# Altium PCB BalanceCar.PcbDoc
Units mm, origin at the board's own origin, x right, y up, seen from the top; angles counter-clockwise.
Board outline 80 x 80 mm, 2 copper layers (Top Layer, Bottom Layer); 50 components, 45 nets, 217 pads, 266 vias.
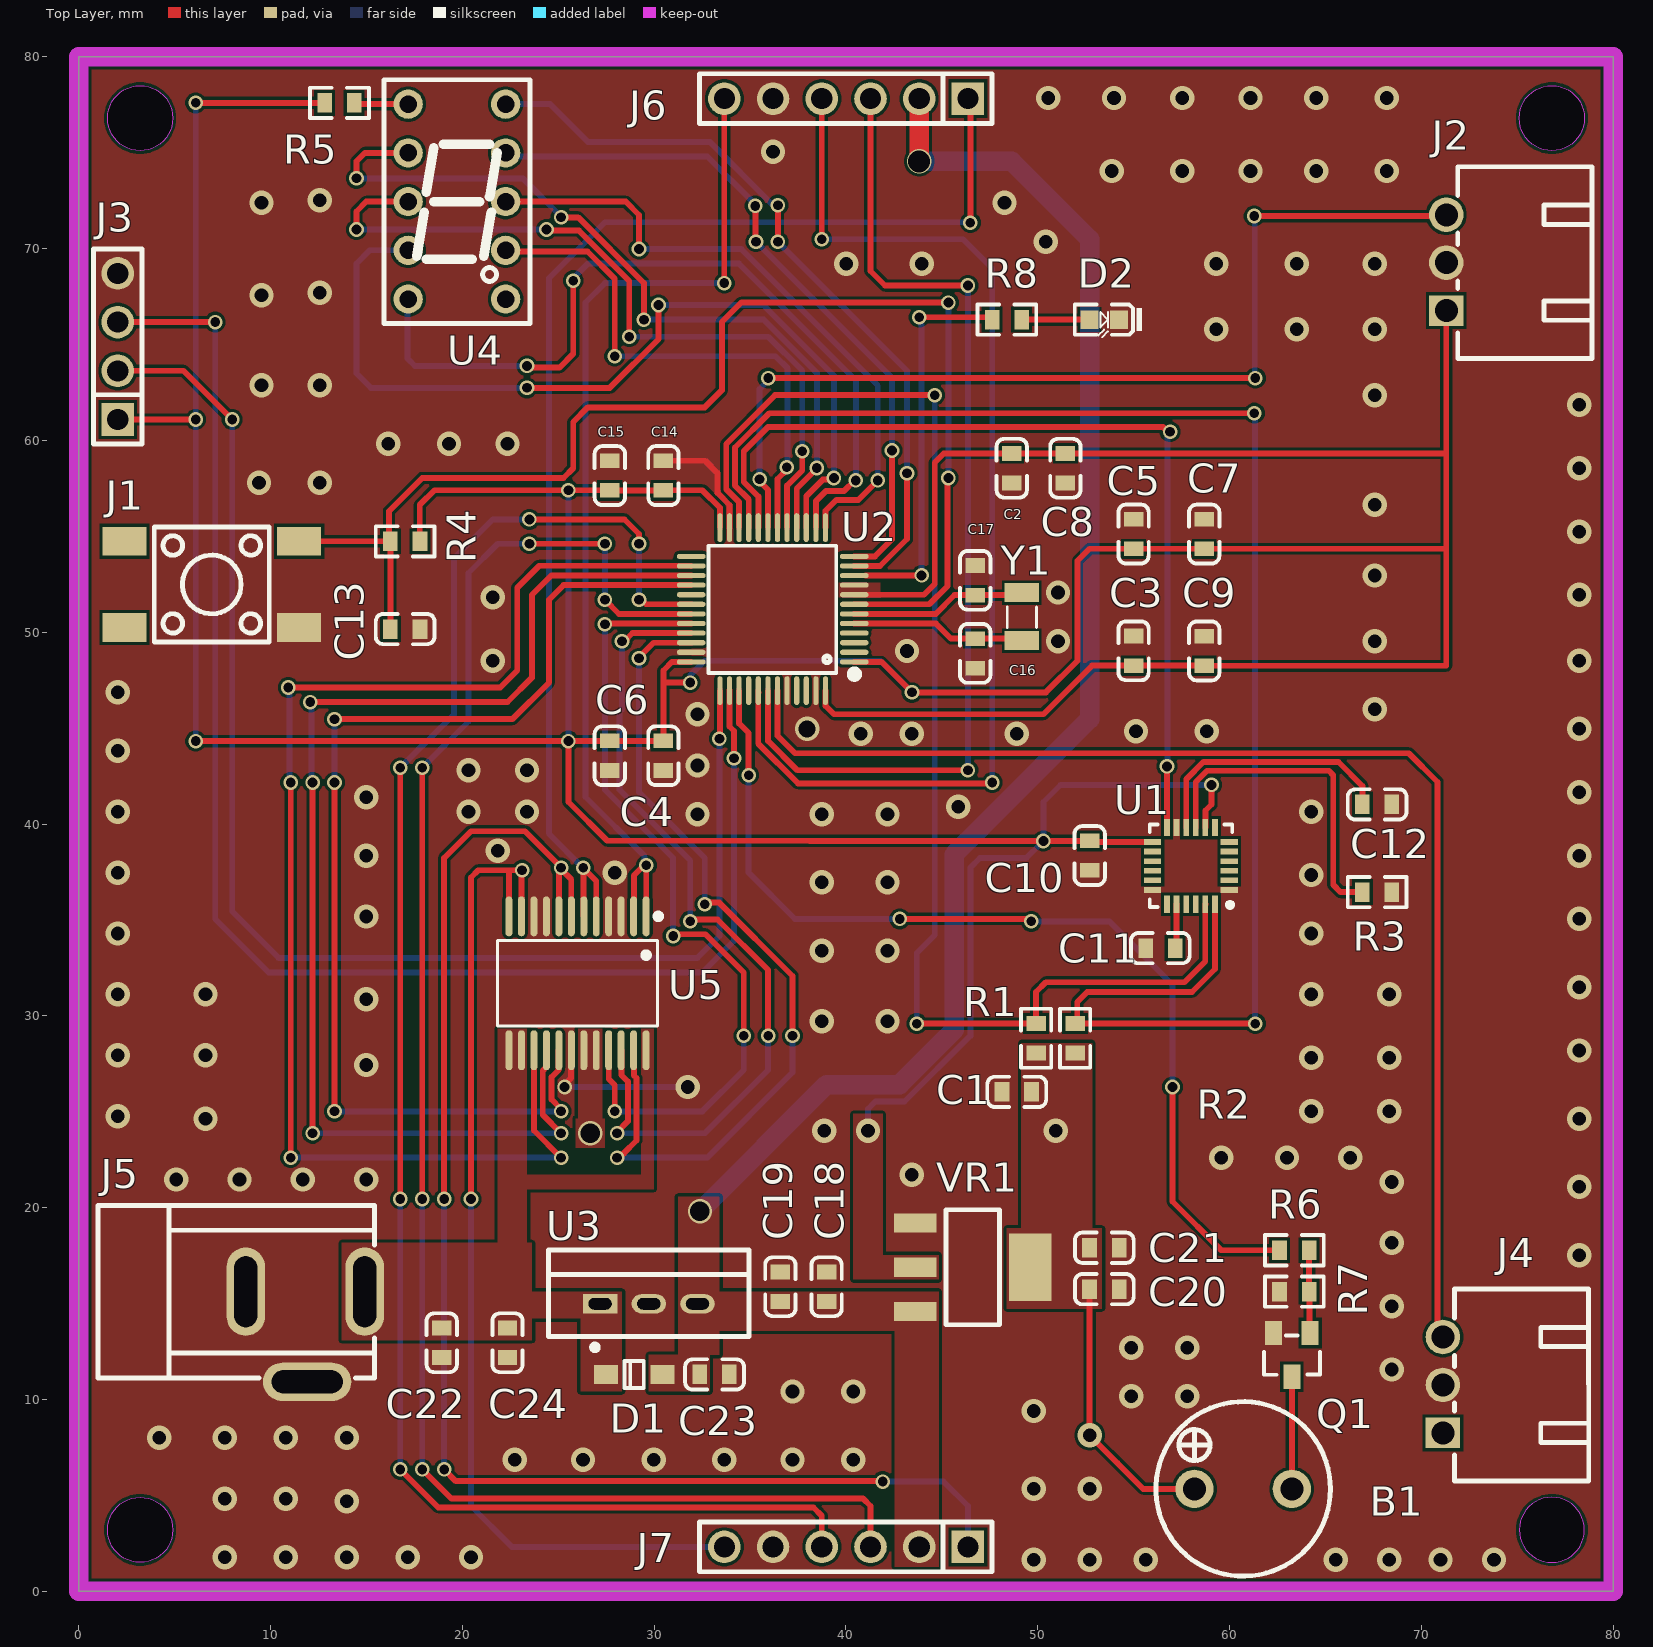
[diagram p0: Top Layer view]
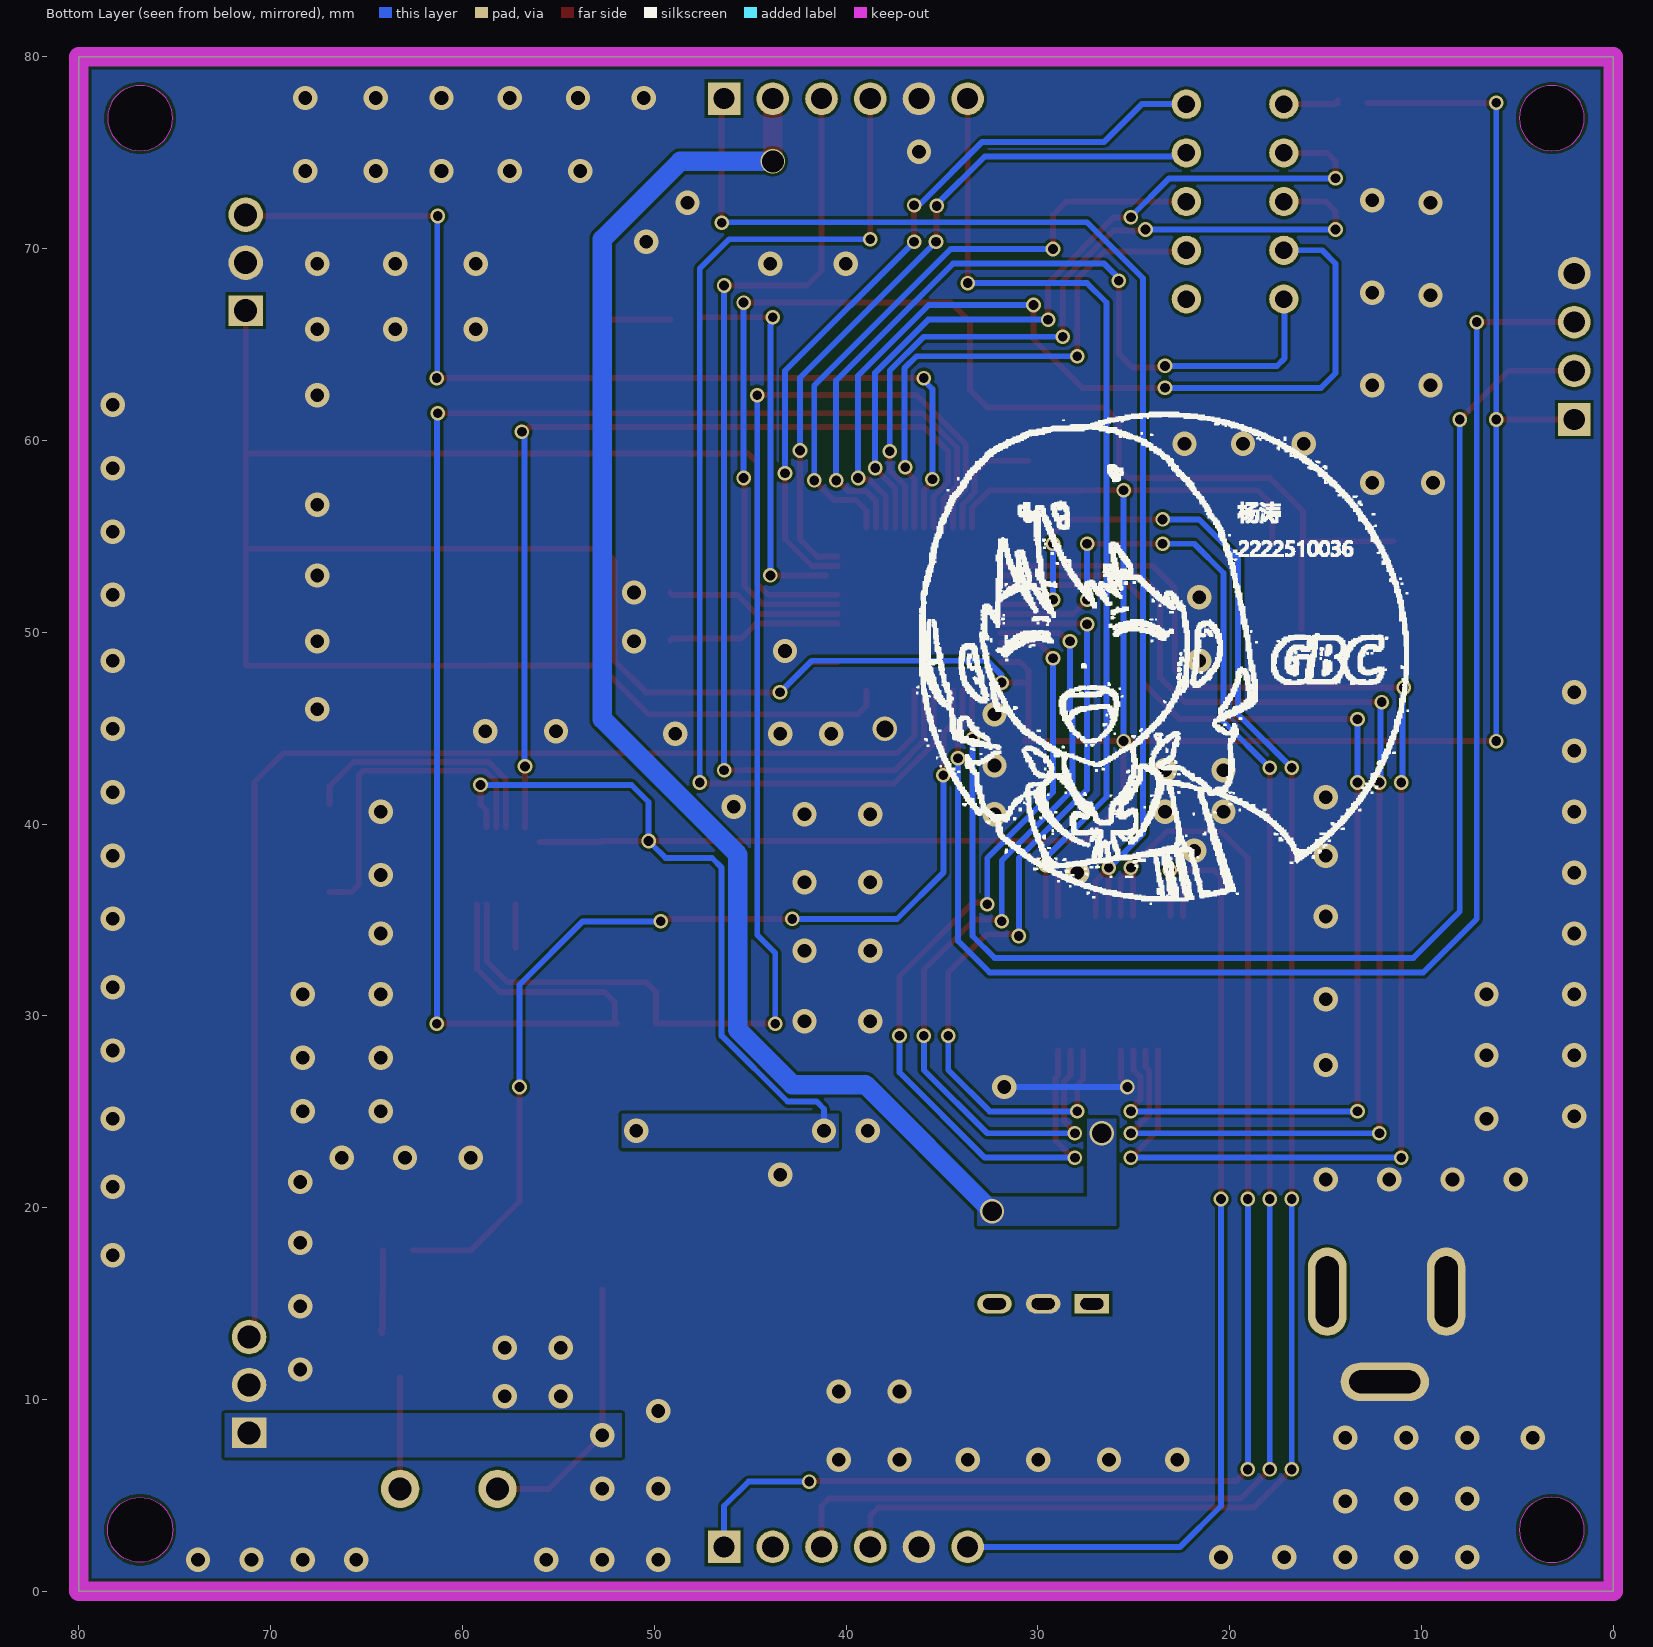
[diagram p1: Bottom Layer view, seen from below]
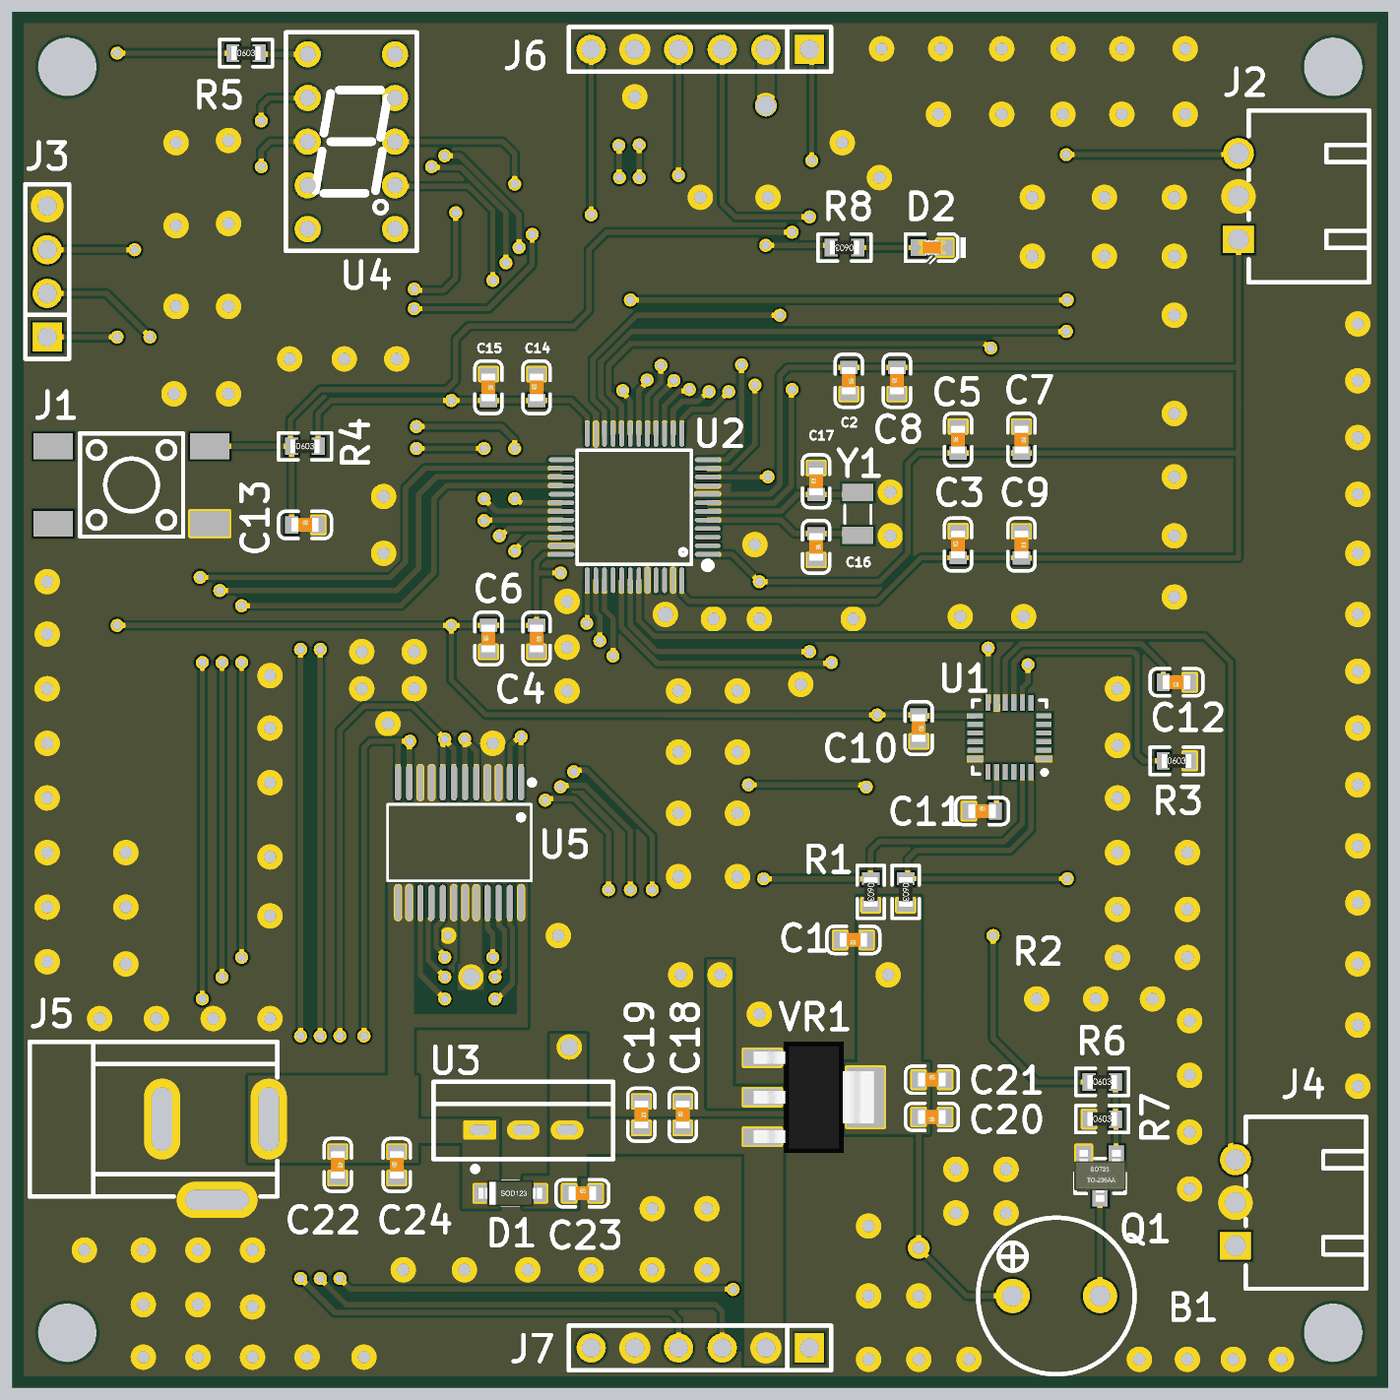
[diagram p2: 3D render of the assembled board from above, using the file's embedded part models]

## Layer stack, top to bottom
Top Solder: solder mask 0.0102, Solder Resist, Dk 3.5
Top Layer: signal copper 0.0356
Dielectric 1: dielectric 0.32, FR-4, Dk 4.8
Bottom Layer: signal copper 0.0356
Bottom Solder: solder mask 0.0102, Solder Resist, Dk 3.5

## Board outline
0,0 0,80 80,80 80,0
cut-out: 75.1,3.2 ccw(c76.8,3.2) 76.8,1.5 ccw(c76.8,3.2) 78.5,3.2 ccw(c76.8,3.2) 76.8,4.9 ccw(c76.8,3.2)
cut-out: 76.8,75.1 cw(c76.8,76.8) 75.1,76.8 cw(c76.8,76.8) 76.8,78.5 cw(c76.8,76.8) 78.5,76.8 cw(c76.8,76.8)
cut-out: 3.2,75.1 cw(c3.2,76.8) 1.5,76.8 cw(c3.2,76.8) 3.2,78.5 cw(c3.2,76.8) 4.9,76.8 cw(c3.2,76.8)
cut-out: 3.2,1.5 cw(c3.2,3.2) 1.5,3.2 cw(c3.2,3.2) 3.2,4.9 cw(c3.2,3.2) 4.9,3.2 cw(c3.2,3.2)

## Design rules (kind name [scope] priority, off if disabled: settings)
Clearance [All] p1: gap=0.152 ignorepadtopadclearanceinfootprint=TRUE
PolygonConnect [All] p1: connectstyle=Direct reliefconductorwidth=0.254 reliefentries=4 polygonreliefangle="90 Angle" airgapwidth=0.254
RoutingVias [All] p1: holewidth=0.508 width=0.762 viastyle="Through Hole" minholewidth=0.508 minwidth=0.762 maxholewidth=1.27 maxwidth=1.27
SolderMaskExpansion [All] p1: expansion=0.102 istentingtop=FALSE
Width [All] p1: maxlimit=1.27 minlimit=0.305 preferedwidth=0.305
30 further rules are at their usual default settings.

## Classes and differential pairs
component class 2_BalanceControl: B1 C1 C2 C3 C4 C5 C6 C7 C8 C9 C10 C11 C12 C13 C14 C15 C16 C17 D2 J1 J2 J3 J4 Q1 R1 R2 R3 R4 R5 R6 R7 R8 U1 U2 U4 Y1
component class 1_Power: *3 C18 C19 C20 C21 C22 C23 C24 D1 J5 J6 J7 U3 U5 VR1

## Components (designator, comment, footprint, x,y, rotation, side; value= is the part's Value field where it differs from the comment)
B1 "BEEP" BEEP-9MM 60.534,5.216 r0 top
C1 "0.1uF/25V" C0603 48.903,26.035 r180 top
C2 "100uF/25V" C0603 48.641,58.547 r270 top
C3 "100uF/25V" C0603 54.991,49.03 r90 top
C4 "100uF/25V" C0603 30.48,43.561 r270 top
C5 "100uF/25V" C0603 54.991,55.118 r90 top
C6 "100nF /25V" C0603 27.686,43.561 r90 top
C7 "100nF /25V" C0603 58.674,55.118 r270 top
C8 "100nF /25V" C0603 51.435,58.547 r90 top
C9 "100nF /25V" C0603 58.674,49.022 r270 top
C10 "10nF /25V" C0603 52.705,38.354 r270 top
C11 "2.2nF /25V" C0603 56.388,33.528 r0 top
C12 "0.1uF/25V" C0603 67.691,41.021 r180 top
C13 "1uF /25V" C0603 17.018,50.165 r0 top
C14 "100uF/25V" C0603 30.48,58.166 r90 top
C15 "100nF /25V" C0603 27.686,58.166 r270 top
C16 "12pF/25V" C0603 46.736,48.895 r270 top
C17 "12pF/25V" C0603 46.736,52.705 r90 top
C18 "100uF/25V" C0603 38.989,15.875 r90 top
C19 "100nF/25V" C0603 36.576,15.875 r270 top
C20 "100nF/25V" C0603 53.467,15.748 r180 top
C21 "100uF/25V" C0603 53.467,17.907 r0 top
C22 "100uF/25V" C0603 18.923,12.954 r270 top
C23 "100uF/25V" C0603 33.147,11.303 r0 top
C24 "100nF/25V" C0603 22.352,12.954 r90 top
D1 "B5819W  SL" SOD-123 28.956,11.303 r0 top
D2 "红灯 0603" LED-0603_S1 53.459,66.294 r180 top
J1 "SW" SW-SMD_4P-L6.0-W6.0 6.858,52.451 r0 top
J2 "CON3-2.54" DIP-3P-2.54-W 71.628,69.469 r90 top
J3 "SIP4-CON4" DIP-4P-2.54-N 2.039,64.941 r90 top
J4 "CON3-2.54" DIP-3P-2.54-W 71.453,10.961 r90 top
J5 "DC005-2.5MM" DC-IN-TH_DC005 10.287,15.367 r0 top
J6 "CON6-2.54" HDR-TH_6P-P2.54-V-M 40,79 r180 top
J7 "CON6-2.54" HDR-TH_6P-P2.54-V-M 40,3.5 r180 top
Q1 "S8050" SOT-23-3 63.246,12.319 r90 top
R1 "10KΩ /±5%" R0603 49.911,28.829 r270 top
R2 "10KΩ /±5%" R0603 51.943,28.829 r270 top
R3 "4.7KΩ /±5%" R0603 67.691,36.449 r0 top
R4 "10KΩ ±1%" R0603 17.018,54.737 r0 top
R5 "1KΩ ±1%" R0603 13.589,77.597 r0 top
R6 "1KΩ ±1%" R0603 63.373,17.78 r0 top
R7 "10KΩ ±1%" R0603 63.373,15.621 r0 top
R8 "1KΩ ±1%" R0603 48.387,66.294 r180 top
U1 "MPU6050" QFN-24_L4.0-W4.0-P0.50-BL 58.039,37.719 r90 top
U2 "STM32F103C8T6" LQFP-48_L7.0-W7.0 36.068,50.927 r90 top
U3 "LM7805CTG" TO-220-3_L10.2-W4.5-P2.54-L 29.781,14.873 r0 top
U4 "HDSP-7801" LED-SEG-SMD_HDSP-7801 19.812,72.517 r0 top
U5 "TB6612FNG" SSOP-24_L8.4-W5.8-P0.65-LS7.8-BL 26.035,31.877 r180 top
VR1 "AMS1117-3.3" SOT-223 46.609,16.891 r180 top
Y1 "16MHz" CRYSTAL-SMD_L3.2-W1.5 49.149,50.8 r270 top

## Footprints (in the part's own frame and the unit in brackets; to place one, negate y for a bottom-side part, rotate by r counter-clockwise, add the part's x,y. Pads: shape width x height; smd on the part's side, far side on the other; paste and mask are expansions set on the pad)
BEEP-9MM [mm]
  round 2 hole 1.2: 1(-2.368,0.118) 2(2.712,0.118)
  silkscreen extent -4.37,-4.43 4.72,4.67
C0603 [mil]
  rect 30x40 smd: 1(-30.31,0) 2(30.31,0)
  silkscreen extent -60,-31 60,31, body extent -31,-16 32,16, height 12
CRYSTAL-SMD_L3.2-W1.5 [mm]
  rect 1x1.8 smd paste+0 mask+0.05: 1(-1.261,0.017) 2(1.239,0.017)
  silkscreen extent -0.52,-0.75 0.56,0.78
DC-IN-TH_DC005 [mm]
  oval 2x4.6 hole 1.2 slot 3.7 at 90 deg paste-2539.97 mask+0.051: 1(4.622,0.252) 2(-1.577,0.253)
  oval 4.6x2 hole 1.2 slot 3.7 at 0 deg paste-2539.97 mask+0.051: 3(1.623,-4.448)
  silkscreen extent -9.28,-4.25 5.12,4.75
DIP-3P-2.54-W [mm]
  rect 1.6x1.8 hole 1.2: 1(-2.706,0.333)
  round 1.8 hole 1.2: 2(-0.206,0.333) 3(2.294,0.333)
  silkscreen extent -5.21,-7.27 4.79,-0.27
DIP-4P-2.54-N [mm]
  rect 1.7x1.7 hole 1.1: 1(-3.854,0.007)
  round 1.7 hole 1.1: 2(-1.314,0.007) 3(1.226,0.007) 4(3.766,0.007)
  silkscreen extent -5.12,-1.26 5.04,1.28
HDR-TH_6P-P2.54-V-M [mm]
  rect 1.7x1.7 hole 1.1 paste-2539.97 mask+0.051: 1(-6.357,1.186)
  round 1.7 hole 1.1 paste-2539.97 mask+0.051: 2(-3.817,1.186) 3(-1.277,1.186) 4(1.263,1.186) 5(3.803,1.186) 6(6.343,1.186)
  silkscreen extent -7.61,-0.11 7.64,2.49
LED-0603_S1 [mm]
  rect 0.93x0.98 smd: A(0.77,0) K(-0.77,0)
  silkscreen extent -1.98,-0.79 1.54,0.92, body extent -0.8,-0.4 0.8,0.4, height 0.6
LED-SEG-SMD_HDSP-7801 [mil]
  round 60 hole 36 paste-99999 mask+2: 1(-103.78,197.32) 2(-103.78,97.32) 3(-103.78,-2.68) 4(-103.78,-102.68) 5(-103.78,-202.68) 6(96.22,-202.68) 7(96.22,-102.68) 8(96.22,-2.68) 9(96.22,97.32) 10(96.22,197.32)
  silkscreen extent -154,-253 146,247
LQFP-48_L7.0-W7.0 [mm]
  oval 0.27x1.5 smd paste+0 mask+0.05: 1(-2.474,-4.361) 2(-1.974,-4.361) 3(-1.474,-4.361) 4(-0.974,-4.361) 5(-0.474,-4.361) 6(0.026,-4.361) 7(0.526,-4.361) 8(1.026,-4.361) 9(1.526,-4.361) 10(2.026,-4.361) 11(2.526,-4.361) 12(3.026,-4.361) 25(3.026,4.139) 26(2.526,4.139) 27(2.026,4.139) 28(1.526,4.139) 29(1.026,4.139) 30(0.526,4.139) 31(0.026,4.139) 32(-0.474,4.139) 33(-0.974,4.139) 34(-1.474,4.139) 35(-1.974,4.139) 36(-2.474,4.139)
  oval 1.5x0.27 smd paste+0 mask+0.05: 13(4.526,-2.861) 14(4.526,-2.361) 15(4.526,-1.861) 16(4.526,-1.361) 17(4.526,-0.861) 18(4.526,-0.361) 19(4.526,0.139) 20(4.526,0.639) 21(4.526,1.139) 22(4.526,1.639) 23(4.526,2.139) 24(4.526,2.639) 37(-3.974,2.639) 38(-3.974,2.139) 39(-3.974,1.639) 40(-3.974,1.139) 41(-3.974,0.639) 42(-3.974,0.139) 43(-3.974,-0.361) 44(-3.974,-0.861) 45(-3.974,-1.361) 46(-3.974,-1.861) 47(-3.974,-2.361) 48(-3.974,-2.861)
  silkscreen extent -3.31,-4.57 3.58,3.23
QFN-24_L4.0-W4.0-P0.50-BL [mm]
  rect 0.3x0.9 smd paste+0 mask+0.05: 1(-1.156,-1.946) 2(-0.656,-1.946) 3(-0.156,-1.946) 4(0.344,-1.946) 5(0.844,-1.946) 6(1.344,-1.946) 13(1.344,2.054) 14(0.844,2.054) 15(0.344,2.054) 16(-0.156,2.054) 17(-0.656,2.054) 18(-1.156,2.054)
  rect 0.9x0.3 smd paste+0 mask+0.05: 7(2.094,-1.196) 8(2.094,-0.696) 9(2.094,-0.196) 10(2.094,0.304) 11(2.094,0.804) 12(2.094,1.304) 19(-1.906,1.304) 20(-1.906,0.804) 21(-1.906,0.304) 22(-1.906,-0.196) 23(-1.906,-0.696) 24(-1.906,-1.196)
  silkscreen extent -2.19,-2.23 2.26,2.2
R0603 [mil]
  rect 30x40 smd: 1(-30.31,0) 2(30.32,0)
  silkscreen extent -60,-31 60,31, body extent -33,-16 33,16, height 22
SOD-123 [mm]
  rect 1.25x1 smd: 1(1.475,0) 2(-1.475,0)
  silkscreen extent -0.5,-0.7 0.5,0.7, body extent -1.85,-0.77 1.85,0.78, height 1.35
SOT-23-3 [mil]
  rect 50x35 smd: 1(45,-37.4) 2(45,37.4) 3(-45,0)
  silkscreen extent -41,-57 40,57, body extent -59,-59 59,59, height 51
SOT-223 [mm]
  rect 2.2x1 smd: 1(3,-2.3) 2(3,0) 3(3,2.3)
  rect 2.2x3.5 smd: 4(-3,0)
  silkscreen extent -1.4,-3 1.4,3, body extent -3.49,-3.4 3.49,3.4, height 1.64
SSOP-24_L8.4-W5.8-P0.65-LS7.8-BL [mm]
  oval 0.364x2.082 smd paste+0 mask+0.051: 1(-3.544,-3.31) 2(-2.894,-3.31) 3(-2.244,-3.31) 4(-1.594,-3.31) 5(-0.944,-3.31) 6(-0.294,-3.31) 7(0.356,-3.31) 8(1.006,-3.31) 9(1.656,-3.31) 10(2.306,-3.31) 11(2.956,-3.31) 12(3.606,-3.31) 13(3.606,3.672) 14(2.956,3.672) 15(2.306,3.672) 16(1.656,3.672) 17(1.006,3.672) 18(0.356,3.672) 19(-0.294,3.672) 20(-0.944,3.672) 21(-1.594,3.672) 22(-2.244,3.672) 23(-2.894,3.672) 24(-3.544,3.672)
  silkscreen extent -4.33,-3.46 4.21,2.4
SW-SMD_4P-L6.0-W6.0 [mm]
  rect 2.3x1.5 smd: 1(-4.474,2.288) 2(4.626,2.288) 3(-4.474,-2.212) 4(4.626,-2.212)
  silkscreen extent -2.92,-2.96 3.08,3.04
TO-220-3_L10.2-W4.5-P2.54-L [mm]
  rect 1.8x1 hole 0.6 slot 1.2 at 0 deg paste-2539.97 mask+0.051: 1(-2.603,0.113)
  oval 1.8x1 hole 0.6 slot 1.2 at 0 deg paste-2539.97 mask+0.051: 2(-0.063,0.113) 3(2.477,0.113)
  silkscreen extent -5.29,-2.31 5.16,2.91

## Part data
C1 C10 C11 C12 C15: library part "1206 100nF (104) 10% 50V", "贴片电容", Package=1206, SuppliersPartNumber=C24497, ComponentLink1Description=供应商链接, ComponentLink1URL=http://www.szlcsc.com/product/details_25237.html, Supplier=LC
C6 C7 C8 C9 C13: library part "0402 20pF (200) 5% 50V", "贴片电容", Package=0402, SuppliersPartNumber=C1554, ComponentLink1Description=供应商链接, ComponentLink1URL=http://www.szlcsc.com/product/details_1906.html, Supplier=LC
C16 C17 C19 C20 C24: library part "0805 100nF(104) 10% 50V", "贴片电容", Package=0805, SuppliersPartNumber=C49678, ComponentLink1Description=供应商链接, ComponentLink1URL=http://www.szlcsc.com/product/details_50686.html, Supplier=LC
D1: library part "SOD-123 B5819W  SL", "肖特基二极管", Package=SOD-123, SuppliersPartNumber=C8598, ComponentLink1Description=供应商链接, ComponentLink1URL=http://www.szlcsc.com/product/details_9093.html, Supplier=LC
D2: library part "0603 红灯", "发光二极管", Package=0603, SuppliersPartNumber=C2286, ComponentLink1Description=供应商链接, ComponentLink1URL=http://www.szlcsc.com/product/details_2659.html, Supplier=LC
R1 R2 R3 R4: library part "0402 0Ω (0R0) 1%", "贴片电阻", Package=0402, SuppliersPartNumber=C17168, ComponentLink1Description=供应商链接, ComponentLink1URL=http://www.szlcsc.com/product/details_17853.html, Supplier=LC
R5 R6 R7 R8: library part "0603 1KΩ (1001) 1%", "贴片电阻", Package=0603, SuppliersPartNumber=C21190, ComponentLink1Description=供应商链接, ComponentLink1URL=http://www.szlcsc.com/product/details_21904.html, Supplier=LC
VR1: library part "SOT-223 AMS1117-3.3", "低压差线性稳压(LDO)", Package=SOT-223, SuppliersPartNumber=C6186, ComponentLink1Description=供应商链接, ComponentLink1URL=http://www.szlcsc.com/product/details_6652.html, Supplier=LC
Y1: library part "FC-135R 32.7680KF"

## Via types
v1: diameter 1.27, hole 0.711, Top Layer to Bottom Layer, 156 vias
v2: diameter 0.762, hole 0.508, Top Layer to Bottom Layer, 106 vias
v3: diameter 1.27, hole 1.016, Top Layer to Bottom Layer, 2 vias
v4: diameter 1.27, hole 1.143, Top Layer to Bottom Layer, 1 vias
v5: diameter 1.27, hole 0.889, Top Layer to Bottom Layer, 1 vias

## Nets (pads, with @x,y where several pads share a name; then routed paths per layer and width w, separated by ;. In a path a pad name is that pad's centre, name@x,y a point inside that pad or via, vN(x,y) a via of type N, cw(c..) or ccw(c..) an arc to the next point about the centre after c; other vN are vias at no path point)
AIN1: U2.32 U5.21 | length 43.1
  Top Layer w0.305: v2(27.432,50.419) 27.466,50.453 U2.32 ; U5.21 27.629,26.707 27.94,26.396 v2(27.94,25.019) ; v2(30.988,34.163) 31.075,34.25 32.679,34.25 34.671,32.258 34.671,29.167 34.587,29.083 34.544,29.083 v2(34.671,28.956)
  Bottom Layer w0.305: v2(27.432,50.419) 27.432,41.783 30.988,38.227 v2(30.988,34.163) ; v2(27.94,25.019) 27.94,24.892 28.067,25.019 32.512,25.019 34.671,27.178 v2(34.671,28.956)
AIN2: U2.33 U5.22 | length 44.5
  Top Layer w0.305: v2(28.067,23.876) 28.067,23.944 28.626,24.503 28.626,26.573 28.291,26.908 28.291,28.194 U5.22 ; v2(28.321,49.53) 28.445,49.53 28.868,49.953 U2.33 ; v2(31.877,34.936) 31.964,35.024 33.302,35.024 35.941,32.385 v2(35.941,28.956)
  Bottom Layer w0.305: v2(28.067,23.876) 32.639,23.876 35.941,27.178 v2(35.941,28.956) v2@35.814,29.083 ; v2(28.321,49.53) 28.321,45.967 28.194,45.84 28.194,41.783 31.877,38.1 v2(31.877,34.936)
BEEP: R6.1 U2.39 | length 52.1
  Top Layer w0.305: U2.39 34.429,45.235 34.925,44.739 v2(34.925,42.545) ; v2(42.799,35.052) 49.53,35.052 v2(49.657,34.925) ; v2(57.023,26.289) 57.023,20.32 59.563,17.78 R6.1
  Bottom Layer w0.305: v2(34.925,42.545) 34.925,37.465 37.338,35.052 v2(42.799,35.052) ; v2(49.657,34.925) 53.721,34.925 57.023,31.623 v2(57.023,26.289)
BIN1: U2.28 U5.17 | length 59.8
  Top Layer w0.305: v2(13.335,25.019) v2(13.335,42.164) ; v2(13.335,45.466) 22.606,45.466 24.511,47.371 24.511,51.689 25.275,52.453 U2.28 ; U5.17 25.018,28.194 25.018,27.177 24.644,26.803 24.644,25.645 25.146,25.143 v2(25.146,25.019)
  Bottom Layer w0.305: v2(13.335,25.019) v2(25.146,25.019) ; v2(13.335,42.164) v2(13.335,45.466)
BIN2: U2.27 U5.16 | length 65.4
  Top Layer w0.305: v2(12.065,46.355) 22.352,46.355 23.622,47.625 23.622,51.943 24.638,52.959 31.923,52.959 U2.27 ; v2(12.192,23.876) v2(12.192,42.164) ; U5.16 24.379,27.33 24.187,27.137 24.187,24.835 v2(25.146,23.876)
  Bottom Layer w0.305: v2(12.065,46.355) 12.128,46.291 12.128,42.227 v2(12.192,42.164) ; v2(12.192,23.876) v2(25.146,23.876)
GND: C1.2 C2.2 C3.2 C4.2 C5.2 C6.1 C7.1 C8.1 C9.1 C10.2 C11.1 C12.1 C13.2 C14.2 C15.1 C16.2 C17.2 C18.2 C19.1 C20.1 C21.2 C22.2 C23.2 C24.1 D2.K J1.4 J2.2 J3.4 J4.2 J5.2 J5.3 J6.5 J7.5 Q1.2 R3.2 R7.1 U1.1 U1.11 U1.18 U2.23 U2.35 U2.44 U2.47 U3.2 U5.3 U5.4 U5.9 U5.10 U5.18 VR1.1 | length 14.7
  Top Layer w0.305: v2(25.33,26.289) 25.33,26.413 25.668,26.751 25.668,28.194 U5.18 ; C14.2 32.656,58.936 33.299,58.293 33.299,57.263 33.929,56.633 U2.23
  Bottom Layer w0.305: v2(25.33,26.289) v1(31.75,26.289)
  other v1: 49.784,1.651 52.705,1.651 55.626,1.651 65.532,1.651 68.326,1.651 70.993,1.651 73.787,1.651 7.62,1.778 10.795,1.778 13.97,1.778 17.145,1.778 20.447,1.778 13.97,4.699 7.62,4.826 10.795,4.826 49.784,5.334 52.705,5.334 22.733,6.858 26.289,6.858 29.972,6.858 33.655,6.858 37.211,6.858 40.386,6.858 4.191,8.001 7.62,8.001 10.795,8.001 13.97,8.001 49.784,9.398 54.864,10.16 57.785,10.16 37.211,10.414 40.386,10.414 68.453,11.557 54.864,12.7 57.785,12.7 68.453,14.859 78.232,17.526 68.453,18.161 78.232,21.082 68.453,21.336 5.08,21.463 8.382,21.463 11.684,21.463 14.986,21.463 43.434,21.717 59.563,22.606 62.992,22.606 66.294,22.606 38.862,24.003 6.604,24.638 78.232,24.638 2.032,24.765 64.262,25.019 68.326,25.019 14.986,27.432 64.262,27.813 68.326,27.813 2.032,27.94 6.604,27.94 78.232,28.194 38.735,29.718 42.164,29.718 14.986,30.861 2.032,31.115 6.604,31.115 64.262,31.115 68.326,31.115 78.232,31.496 38.735,33.401 42.164,33.401 2.032,34.29 64.262,34.29 78.232,35.052 14.986,35.179 38.735,36.957 42.164,36.957 64.262,37.338 2.032,37.465 27.94,37.465 14.986,38.354 78.232,38.354 21.844,38.608 32.258,40.513 38.735,40.513 42.164,40.513 2.032,40.64 20.32,40.64 23.368,40.64 64.262,40.64 45.847,40.894 14.986,41.402 78.232,41.656 20.32,42.799 23.368,42.799 32.258,43.053 2.032,43.815 40.767,44.704 43.434,44.704 48.895,44.704 55.118,44.831 58.801,44.831 78.232,44.958 32.258,45.72 67.564,45.974 2.032,46.863 21.59,48.514 78.232,48.514 43.18,49.022 51.054,49.53 67.564,49.53 21.59,51.816 78.232,51.943 51.054,52.07 67.564,52.959 78.232,55.245 67.564,56.642 9.398,57.785 12.573,57.785 78.232,58.547 16.129,59.817 19.304,59.817 22.352,59.817 78.232,61.849 67.564,62.357 9.525,62.865 12.573,62.865 59.309,65.786 63.5,65.786 67.564,65.786 9.525,67.564 12.573,67.691 40.005,69.215 43.942,69.215 59.309,69.215 63.5,69.215 67.564,69.215 50.419,70.358 9.525,72.39 48.26,72.39 12.573,72.517 53.848,74.041 57.531,74.041 61.087,74.041 64.516,74.041 68.199,74.041 36.195,75.057 50.546,77.851 53.975,77.851 57.531,77.851 61.087,77.851 64.516,77.851 68.199,77.851
  other v5: 37.973,44.958
INT: U1.12 U2.20 | length 47.9
  Top Layer w0.305: U2.20 35.429,57.073 34.671,57.831 34.671,59.436 35.941,60.706 56.518,60.706 56.772,60.452 v2(56.896,60.452) ; U1.12 56.736,39.814 56.736,43.001 v2(56.737,43.002)
  Bottom Layer w0.305: v2(56.737,43.002) 56.769,43.034 56.769,60.201 56.896,60.328 v2(56.896,60.452)
LED: R8.2 U2.10 | length 20.3
  Top Layer w0.305: U2.10@41.027,52.956 43.939,52.956 v2(43.942,52.959) ; v2(43.815,66.421) 47.49,66.421 R8.2
  Bottom Layer w0.305: v2(43.815,66.421) 43.902,66.334 43.902,66.053 43.942,66.014 v2(43.942,52.959)
Motor_LA: J7.3 U2.31 | length 89.5
  Top Layer w0.305: v2(17.907,6.35) 19.431,4.826 40.894,4.826 41.277,4.443 41.277,2.415 41.275,2.413 41.277,2.411 J7.3 ; v2(17.907,20.447) v2(17.907,42.926) ; v2(23.495,54.61) v2(27.432,54.61) ; v2(27.432,51.689) 28.168,50.953 U2.31
  Bottom Layer w0.305: v2(17.907,6.35) v2(17.907,20.447) ; v2(17.907,42.926) 20.32,45.339 20.32,53.086 21.844,54.61 v2(23.495,54.61) ; v2(27.432,51.689) v2(27.432,54.61)
Motor_LB: J7.4 U2.30 | length 90.3
  Top Layer w0.305: v2(16.764,6.35) 18.745,4.369 38.303,4.369 38.737,3.935 J7.4 ; v2(16.764,20.447) v2(16.764,42.926) ; v2(23.495,55.88) 28.448,55.88 29.21,55.118 v2(29.21,54.61) ; v2(29.21,51.689) 29.334,51.689 29.57,51.453 U2.30
  Bottom Layer w0.305: v2(16.764,6.35) v2(16.764,20.447) ; v2(16.764,42.926) 19.558,45.72 19.558,53.848 21.59,55.88 v2(23.495,55.88) ; v2(29.21,51.689) v2(29.21,54.61)
Motor_RA: J6.3 U2.42 | length 53.3
  Top Layer w0.305: U2.42 35.929,44.335 37.465,42.799 v2(46.355,42.799) ; J6.3 41.275,77.812 41.275,68.834 42.037,68.072 v2(46.355,68.072)
  Bottom Layer w0.305: v2(46.355,42.799) v2(46.355,68.072)
Motor_RB: J6.4 U2.41 | length 59.5
  Top Layer w0.305: U2.41 35.429,46.867 35.433,46.863 35.429,46.859 35.429,44.188 37.504,42.113 47.574,42.113 v2(47.625,42.164) ; v2(38.735,70.485) v2(38.735,70.485) 38.736,77.813 J6.4
  Bottom Layer w0.305: v2(38.735,70.485) 46.101,70.485 47.625,68.961 v2(47.625,42.164)
MotorA+: J6.6 U5.1 U5.2 | length 53.6
  Top Layer w0.305: U5.2 28.941,35.198 28.941,37.315 29.472,37.846 v2(29.591,37.846) 29.585,37.84 29.585,35.193 U5.1 ; v2(33.655,68.199) v2(33.655,68.199) 33.656,77.723 33.655,77.724 33.657,77.726 J6.6
  Bottom Layer w0.305: v2(29.591,37.846) 29.504,37.933 29.504,38.314 26.416,41.402 26.416,67.183 27.432,68.199 v2(33.655,68.199)
MotorA-: J6.1 U5.5 U5.6 | length 66.5
  Top Layer w0.305: v2(26.303,37.725) 26.318,37.71 26.318,35.198 U5.6 ; v2@26.318,37.69 26.979,37.029 U5.5 ; J6.1 46.482,77.689 v2(46.482,71.349)
  Bottom Layer w0.305: v2(26.303,37.725) 26.283,37.725 24.511,39.497 24.511,68.453 27.432,71.374 46.457,71.374 v2(46.482,71.349)
MotorB+: J7.6 U5.11 U5.12 | length 54.5
  Top Layer w0.305: v2(20.447,20.447) 20.447,37.211 20.828,37.592 22.429,37.592 ; U5.12 22.429,37.592 ; v2@23.068,37.546 23.091,37.523 23.091,35.198 U5.11 ; v2(23.114,37.592) 22.429,37.592
  Bottom Layer w0.305: v2(20.447,20.447) 20.447,4.445 22.578,2.314 J7.6
MotorB-: J7.1 U5.7 U5.8 | length 74.9
  Top Layer w0.305: v2(19.05,6.35) 19.66,5.74 41.885,5.74 v2(41.91,5.715) ; v2(19.05,20.447) 19.05,38.227 20.447,39.624 23.262,39.624 25.146,37.74 v2(25.146,37.719) ; U5.8 25.029,37.479 25.146,37.595 v2(25.146,37.719) ; U5.7 25.679,37.112 25.146,37.646 v2(25.146,37.719)
  Bottom Layer w0.305: v2(19.05,6.35) v2(19.05,20.447) ; v2(41.91,5.715) 45.085,5.715 46.357,4.443 J7.1
NetB1_2: B1.2 Q1.3 | length 5.8
  Top Layer w0.305: B1.2 63.246,9.144 ; 63.246,9.919 Q1.3 ; 63.247,9.145 63.247,9.919
NetC11_2: C11.2 U1.20 | length 2.3
  Top Layer w0.305: C11.2@57.235,33.528 U1.20
NetC12_2: C12.2 U1.10 | length 13.6
  Top Layer w0.305: U1.10 57.735,42.334 58.632,43.231 65.676,43.231 66.921,41.986 C12.2
NetC13_1: C13.1 J1.2 R4.1 U2.7 | length 68.2
  Top Layer w0.305: J1.2 R4.1@16.246,54.739 ; C13.1 R4.1 R4.1@16.246,54.739 ; U2.7 44.341,51.453 45.288,52.4 45.288,57.988 v2(45.339,58.039) ; v2(45.339,67.183) 34.544,67.183 33.528,66.167 33.528,62.611 32.639,61.722 26.543,61.722 25.781,60.96 25.781,58.547 25.273,58.039 17.907,58.039 16.174,56.306 16.174,54.811 R4.1@16.246,54.739
  Bottom Layer w0.305: v2(45.339,58.039) v2(45.339,67.183)
NetD2_A: D2.A R8.1 | length 3.5
  Top Layer w0.305: R8.1 D2.A
NetQ1_1: Q1.1 R6.2 R7.2 | length 4.4
  Top Layer w0.305: R6.2 R7.2 64.17,15.595 64.17,13.681 64.262,13.589 64.196,13.523 Q1.1
NetR3_1: R3.1 U1.9 | length 17.3
  Top Layer w0.305: U1.9 58.235,42.187 58.822,42.774 65.176,42.774 65.405,42.545 65.405,36.83 65.786,36.449 R3.1
NetR5_2: R5.2 U4.1 | length 3
  Top Layer w0.305: R5.2@14.351,77.724 R5.2@14.359,77.716 ; R5.2 R5.2@14.359,77.716 ; U4.1 14.546,77.529 R5.2@14.359,77.716
OSC_IN: C16.1 U2.5 Y1.2 | length 9.1
  Top Layer w0.305: U2.5 44.686,50.453 45.474,49.665 49.062,49.665 Y1.2
OSC_OUT: C17.1 U2.6 Y1.1 | length 9.2
  Top Layer w0.305: U2.6 44.678,50.953 45.66,51.935 C17.1 49.04,51.935 Y1.1
PA1: U2.11 U4.10 | length 39.9
  Top Layer w0.305: v2(36.449,70.358) v2(36.449,72.263) ; U2.11 41.769,53.453 43.18,54.864 v2(43.18,58.293)
  Bottom Layer w0.305: U4.10 24.579,77.529 26.543,75.565 32.893,75.565 36.108,72.35 36.362,72.35 v2(36.449,72.263) ; v2(36.449,70.358) 43.18,63.627 v2(43.18,58.293)
PA2: U2.12 U4.9 | length 36.9
  Top Layer w0.305: v2(35.266,72.223) 35.286,72.202 35.286,70.378 v2(35.306,70.358) ; U2.12 41.507,53.953 42.399,54.845 v2(42.399,59.472)
  Bottom Layer w0.305: U4.9 22.442,74.803 32.766,74.803 35.266,72.303 v2(35.266,72.223) ; v2(35.306,70.358) 42.399,63.265 v2(42.399,59.472)
PA3: U2.13 U4.8 | length 33.6
  Top Layer w0.305: U4.8 28.516,72.449 29.21,71.755 v2(29.21,69.977) ; U2.13 38.929,56.328 39.497,56.896 40.64,56.896 v2(41.656,57.912)
  Bottom Layer w0.305: v2(29.21,69.977) 34.544,69.977 41.656,62.865 v2(41.656,57.912)
PA4: U2.14 U4.5 | length 42.9
  Top Layer w0.305: v2(23.368,63.881) 23.445,63.804 25.069,63.804 25.781,64.516 v2(25.781,68.326) ; U2.14 38.429,56.833 38.95,57.353 39.886,57.353 40.445,57.912 v2(40.513,57.912)
  Bottom Layer w0.305: U4.5 17.145,67.338 17.145,64.262 17.526,63.881 v2(23.368,63.881) ; v2(25.781,68.326) 25.781,68.453 26.543,69.215 34.417,69.215 40.513,63.119 v2(40.513,57.912)
PA5: U2.15 U4.4 | length 47.1
  Top Layer w0.305: v2(23.368,62.738) 27.686,62.738 30.226,65.278 v2(30.226,67.056) ; U2.15 37.929,57.094 38.786,57.952 39.283,57.952 v2(39.37,58.039)
  Bottom Layer w0.305: U4.4 15.172,69.909 14.478,69.215 14.478,63.5 15.24,62.738 v2(23.368,62.738) ; v2(30.226,67.056) 35.687,67.056 39.37,63.373 v2(39.37,58.039)
PA6: U2.16 U4.2 | length 41.6
  Top Layer w0.305: v2(14.478,73.66) 14.478,74.549 14.918,74.989 U4.2 ; v2(25.146,71.628) 26.035,71.628 29.464,68.199 v2(29.464,66.294) ; U2.16 37.429,57.495 38.473,58.539 v2(38.473,58.562)
  Bottom Layer w0.305: v2(14.478,73.66) 23.152,73.66 25.146,71.666 v2(25.146,71.628) ; v2(29.464,66.294) 35.71,66.294 38.481,63.523 38.481,58.569 v2(38.473,58.562)
PA7: U2.17 U4.3 | length 40.4
  Top Layer w0.305: v2(14.478,70.993) 14.478,71.935 14.992,72.449 U4.3 ; v2(24.384,70.993) 24.435,70.942 26.074,70.942 28.702,68.314 v2(28.702,65.405) ; U2.17 36.929,57.642 37.719,58.432 v2(37.719,59.436)
  Bottom Layer w0.305: v2(14.478,70.993) v2(24.384,70.993) ; v2(28.702,65.405) 35.953,65.405 37.719,63.639 v2(37.719,59.436)
PA8: U2.18 U4.7 | length 28.1
  Top Layer w0.305: U4.7 22.315,69.85 26.52,69.85 27.94,68.43 v2(27.94,64.389) ; U2.18 36.429,57.988 36.911,58.47 v2(36.911,58.593)
  Bottom Layer w0.305: v2(27.94,64.389) 36.322,64.389 36.957,63.754 36.957,58.639 v2(36.911,58.593)
PB1: J2.3 U2.19 | length 52.1
  Top Layer w0.305: v2(35.497,57.976) 35.497,57.852 35.929,57.419 U2.19 ; v2(35.941,63.246) v2(61.341,63.246) ; v2(61.281,71.695) 71.228,71.695 J2.3
  Bottom Layer w0.305: v2(35.497,57.976) 35.497,62.678 35.941,63.122 v2(35.941,63.246) ; v2(61.281,71.695) 61.311,71.665 61.311,63.276 v2(61.341,63.246)
PB7: J4.3 U2.43 | length 66.8
  Top Layer w0.305: U2.43 36.429,44.597 37.338,43.688 69.342,43.688 70.838,42.192 70.838,13.537 J4.3
PWMA: U2.34 U5.23 | length 45.7
  Top Layer w0.305: v2(28.067,22.606) 28.191,22.606 28.415,22.83 28.418,22.83 29.083,23.495 29.083,26.762 28.941,26.905 28.941,28.194 U5.23 ; v2(29.21,48.641) 29.21,48.698 29.964,49.453 U2.34 ; v2(32.639,35.814) 32.726,35.901 33.39,35.901 37.211,32.08 v2(37.211,28.956)
  Bottom Layer w0.305: v2(28.067,22.606) 32.766,22.606 37.211,27.051 v2(37.211,28.956) ; v2(29.21,48.641) 29.21,41.656 32.639,38.227 v2(32.639,35.814)
PWMB: U2.26 U5.15 | length 71
  Top Layer w0.305: v2(10.922,47.117) 21.971,47.117 22.86,48.006 22.86,52.324 24.003,53.467 31.915,53.467 U2.26 ; v2(11.049,22.606) v2(11.049,42.164) ; U5.15 23.729,24.023 v2(25.146,22.606)
  Bottom Layer w0.305: v2(10.922,47.117) 10.986,47.053 10.986,42.227 v2(11.049,42.164) ; v2(11.049,22.606) v2(25.146,22.606)
SCL: R1.1 U1.23 U2.22 | length 69.9
  Top Layer w0.305: U2.22 34.429,56.78 33.757,57.453 33.757,59.815 36.299,62.357 v2(44.628,62.357) ; v2(43.688,29.591) R1.1@49.73,29.591 ; R1.1 49.911,31.242 50.419,31.75 57.648,31.75 58.733,32.834 58.733,35.811 U1.23
  Bottom Layer w0.305: v2(43.688,29.591) 43.688,33.274 44.628,34.214 v2(44.628,62.357)
SDA: R2.1 U1.24 U2.21 | length 86
  Top Layer w0.305: U2.21 34.929,56.926 34.214,57.642 34.214,59.625 36.006,61.417 v2(61.29,61.417) ; U1.24 59.235,32.438 58.039,31.242 52.578,31.242 52.054,30.718 52.054,29.71 R2.1 51.947,29.595 61.337,29.595 v2(61.341,29.591)
  Bottom Layer w0.305: v2(61.29,61.417) 61.316,61.392 61.316,29.616 v2(61.341,29.591)
SWCLK: J3.2 U2.37 | length 72.5
  Top Layer w0.305: J3.2 2.032,63.5 2.159,63.627 5.461,63.627 v2(8.001,61.087) ; v2(33.401,44.45) 33.429,44.478 U2.37
  Bottom Layer w0.305: v2(8.001,61.087) 8.001,35.433 10.414,33.02 32.258,33.02 33.401,34.163 v2(33.401,44.45)
SWDIO: J3.3 U2.38 | length 78.4
  Top Layer w0.305: J3.3@1.905,66.04 J3.3 v2(7.112,66.167) ; U2.38@33.929,46.97 U2.38 33.929,45.088 34.163,44.854 v2(34.163,43.434)
  Bottom Layer w0.305: v2(7.112,66.167) 7.112,35.052 9.906,32.258 32.512,32.258 34.163,33.909 v2(34.163,43.434)
VCC_3.3V: B1.1 C1.1 C2.1 C3.1 C4.1 C5.1 C6.2 C7.2 C8.2 C9.2 C10.1 C14.1 C15.2 C20.2 C21.1 J2.1 J3.1 J4.1 R1.2 R2.2 R4.2 R5.1 U1.8 U1.13 U2.1 U2.8 U2.9 U2.24 U2.36 U2.48 VR1.2 VR1.4 | length 332.9
  Top Layer w0.305: J3.1 v2(6.096,61.087) ; v2(6.096,44.323) v2(25.527,44.323) ; v2(6.096,77.597) R5.1 ; R4.2 17.78,54.745 17.78,56.642 18.542,57.404 18.544,57.402 v2(25.528,57.402) ; v2@25.528,57.404 27.678,57.404 C15.2 C14.1 30.488,57.404 32.512,57.404 33.429,56.487 U2.24 ; C4.1@30.701,44.331 27.694,44.331 27.686,44.323 v2(25.527,44.323) ; C4.1@30.709,44.323 30.48,44.552 30.48,47.371 ; v2(31.877,47.371) 30.48,47.371 ; U2.36 30.927,48.453 30.48,48.006 30.48,47.371 ; U2.48 38.929,46.161 39.37,45.72 50.292,45.72 52.832,48.26 C3.1 54.995,48.256 58.67,48.256 C9.2 71.295,48.252 71.295,54.356 ; U2.1 41.849,48.453 v2(43.439,46.863) 50.419,46.863 52.07,48.514 52.07,53.721 52.697,54.348 C5.1 C7.2 71.287,54.348 71.295,54.356 ; U2.8 44.068,51.953 44.628,52.513 44.628,58.852 45.093,59.317 C2.1 C8.2 71.287,59.317 71.295,59.309 ; C20.2 52.701,15.744 v1@52.701,8.259 ; v1@52.705,8.255 v1(52.705,8.131) 52.929,7.907 52.929,7.904 54.146,6.687 55.499,5.334 B1.1@57.912,5.334 ; U1.13 52.766,39.063 C10.1 52.701,39.12 50.296,39.12 v2(50.292,39.116) 41.148,39.116 41.144,39.12 38.104,39.12 38.1,39.124 27.551,39.124 25.527,41.148 v2(25.527,44.323) ; U1.8 58.737,39.815 58.737,40.703 59.055,41.021 v2(59.055,42.037) ; J2.1 71.295,59.309 ; 71.295,54.356 71.295,59.309
  Bottom Layer w0.305: J3.1 J3.1@2.159,60.96 ; v2@6.096,44.34 v2(6.096,61.087) v2(6.096,77.597) ; v2(25.527,44.323) 25.4,44.323 25.527,44.45 v2(25.528,57.402) ; v2(31.877,47.371) 31.877,47.752 32.639,48.514 41.783,48.514 43.434,46.863 v2(43.439,46.863) ; v1(41.148,24.003) 41.148,25.146 41.529,25.527 43.053,25.527 46.482,28.956 46.482,37.719 46.99,38.227 49.403,38.227 50.165,38.989 50.292,38.989 v2(50.292,39.116) 50.292,41.148 51.181,42.037 v2(59.055,42.037) ; J2.1@71.12,66.675 71.208,66.763 J2.1
  other v1: 50.927,24.003
VCC_5V: C18.1 C19.2 C23.1 D1.1 J6.2 J7.2 U3.3 U5.19 U5.20 VR1.3 | length 75.2
  Top Layer w1.016: v4(43.815,74.549) v4(43.815,74.549) 43.816,77.813 J6.2
  Bottom Layer w1.016: v3(32.385,19.812) 38.989,26.416 42.793,26.416 45.641,29.264 45.641,38.402 52.705,45.466 52.705,70.485 48.641,74.549 v4(43.815,74.549)
  other v3: 26.67,23.876
VCC_BAT: C22.1 C24.2 D1.2 J5.1 U3.1 U5.13 U5.14 U5.24
pads on no net: J1.1 J1.3 U1.2 U1.3 U1.4 U1.5 U1.6 U1.7 U1.14 U1.15 U1.16 U1.17 U1.19 U1.21 U1.22 U2.2 U2.3 U2.4 U2.25 U2.29 U2.40 U2.45 U2.46 U4.6

## Polygon pours and split planes (outlines as drawn)
GND on Top Layer "GND_L01_P023" (solid, remove dead copper, pour order 23): 0,80.01 80.01,80.01 80.01,0 0,0
VCC_5V on Top Layer "VCC_5V_L01_P021" (solid, remove dead copper, pour order 21): 42.548,1.27 44.831,1.27 44.831,15.621 42.548,15.621
VCC_3.3V on Top Layer "VCC_3.3V_L01_P019" (solid, remove dead copper, pour order 19): 39.624,52.578 41.783,52.578 41.783,51.816 39.624,51.816
VCC_3.3V on Top Layer "VCC_3.3V_L01_P016" (solid, remove dead copper, pour order 16): 44.831,16.256 40.386,16.256 40.386,24.892 41.91,24.892 41.91,17.526 44.831,17.526
VCC_3.3V on Top Layer "VCC_3.3V_L01_P015" (solid, remove dead copper, pour order 15): 49.149,28.575 52.832,28.575 52.832,18.923 49.149,18.923
VCC_5V on Top Layer "VCC_5V_L01_P012" (solid, remove dead copper, pour order 12): 26.035,29.337 26.035,24.638 25.908,24.638 25.908,23.114 27.432,23.114 27.432,24.638 27.305,24.638 27.305,29.337
VCC_BAT on Top Layer "VCC_BAT_L01_P010" (solid, remove dead copper, pour order 10): 29.972,29.337 29.972,20.955 23.368,20.955 23.368,21.717 29.337,21.717 29.337,29.337
VCC_BAT on Top Layer "VCC_BAT_L01_P007" (solid, remove dead copper, pour order 7): 21.844,29.337 23.368,29.337 23.368,18.161 21.844,18.161
VCC_3.3V on Top Layer "VCC_3.3V_L01_P005" (solid, remove dead copper, pour order 5): 48.387,18.923 53.34,18.923 53.34,14.732 48.387,14.732
VCC_5V on Top Layer "VCC_5V_L01_P004" (solid, remove dead copper, pour order 4): 33.401,15.621 44.831,15.621 44.831,13.589 33.401,13.589
VCC_5V on Top Layer "VCC_5V_L01_P003" (solid, remove dead copper, pour order 3): 31.242,20.574 31.242,12.319 29.718,12.319 29.718,10.414 32.893,10.414 32.893,12.319 33.401,12.319 33.401,20.574
VCC_BAT on Top Layer "VCC_BAT_L01_P002" (solid, remove dead copper, pour order 2): 26.162,14.224 26.162,10.414 28.321,10.414 28.321,14.224
VCC_BAT on Top Layer "VCC_BAT_L01_P001" (solid, remove dead copper, pour order 1): 23.622,15.621 28.321,15.621 28.321,14.224 23.622,14.224
VCC_BAT on Top Layer "VCC_BAT_L01_P000" (solid, remove dead copper, pour order 0): 13.716,18.161 23.622,18.161 23.622,13.081 13.716,13.081
GND on Bottom Layer "GND_L02_P022" (solid, remove dead copper, pour order 22): 0,80.01 0,0 80.01,0 80.01,80.01
VCC_3.3V on Bottom Layer "VCC_3.3V_L02_P018" (solid, remove dead copper, pour order 18): 51.689,9.271 72.39,9.271 72.39,6.985 51.689,6.985
VCC_3.3V on Bottom Layer "VCC_3.3V_L02_P017" (solid, remove dead copper, pour order 17): 40.386,24.892 51.689,24.892 51.689,23.114 40.386,23.114
VCC_5V on Bottom Layer "VCC_5V_L02_P014" (solid, remove dead copper, pour order 14): 25.908,24.638 25.908,19.05 33.147,19.05 33.147,20.574 27.432,20.574 27.432,24.638

## Keep-outs
Keep-Out Layer:
  the board outline again, w1.016

## Silkscreen, mask and mechanical layers (free items; w line width, h text height)
Bottom Overlay:
  drawing of 7281 lines, arcs and shapes, not listed